# Altium PCB DVT-HPF-100kHz.PcbDoc
Units mm, origin at the board's own origin, x right, y up, seen from the top; angles counter-clockwise.
Board outline 60 x 45 mm, 2 copper layers (Top Layer, Bottom Layer); 21 components, 11 nets, 52 pads, 0 vias.
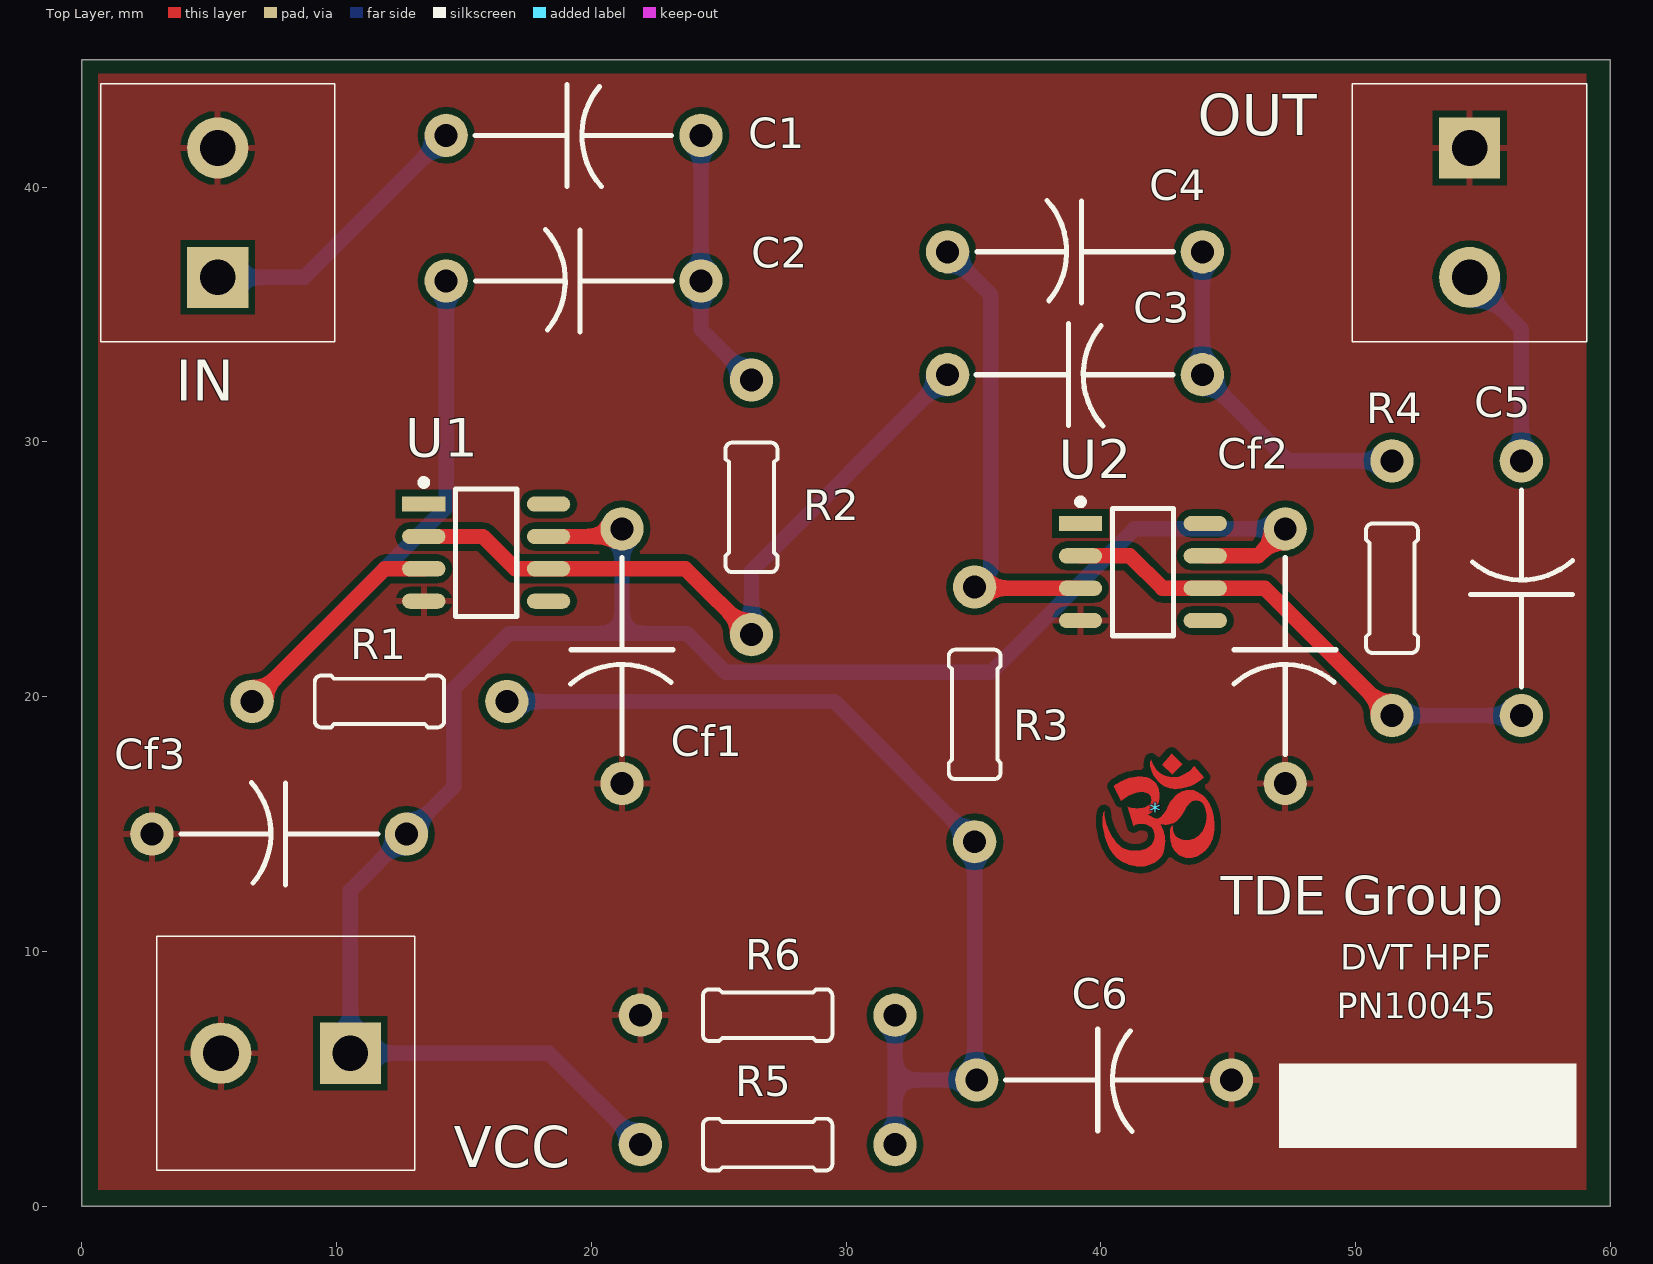
[diagram p0: Top Layer view]
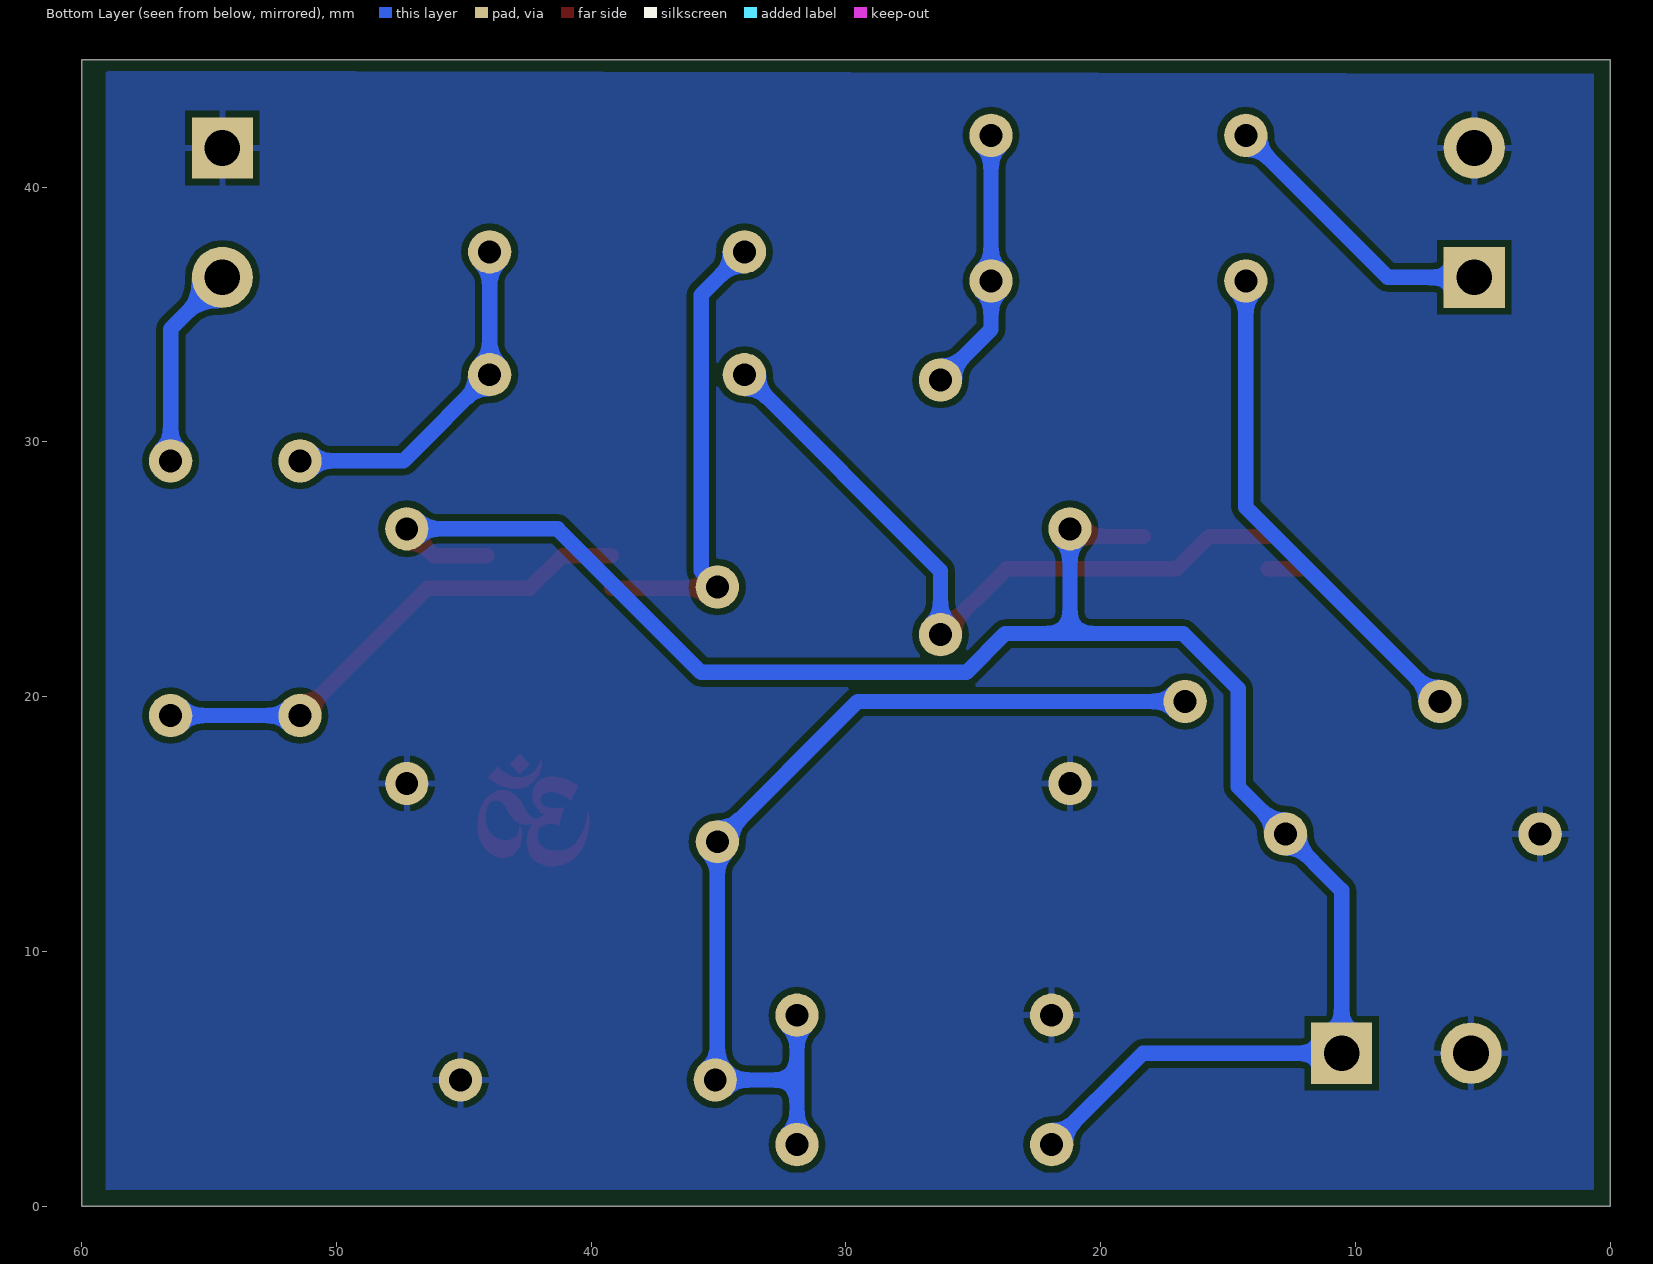
[diagram p1: Bottom Layer view, seen from below]

## Layer stack, top to bottom
Top Solder: solder mask 0.0102, Solder Resist, Dk 3.5
Top Layer: signal copper 0.0356
Dielectric 1: dielectric 0.32, FR-4, Dk 4.8
Bottom Layer: signal copper 0.0356
Bottom Solder: solder mask 0.0102, Solder Resist, Dk 3.5

## Board outline
0,0 0,45 60,45 60,0

## Design rules (kind name [scope] priority, off if disabled: settings)
Clearance Polygons [InPolygon] p1: gap=0.254
Clearance [All] p2: gap=0.15
MinimumSolderMaskSliver [All] p1: minsoldermaskwidth=0.1
PolygonConnect [All] p1: connectstyle=Relief reliefconductorwidth=0.254 reliefentries=4 polygonreliefangle="90 Angle" airgapwidth=0.254
RoomDefinition DVT-HPF-100kHz [InComponentClass('DVT-HPF-100kHz')] p1: confinementstyle=ConfineIn formatcopy=TRUE lockcomponents=FALSE outline -4.953,-7.112 67.31,-7.112 67.31,50.165 -4.953,50.165
RoutingVias [All] p1: holewidth=0.711 width=1.27 viastyle="Through Hole" minholewidth=0 minwidth=0 maxholewidth=0.711 maxwidth=1.27
SilkToSilkClearance [All] p1: silktosilkclearance=0.1
SilkToSolderMaskClearance [IsPad] p1: minsilkscreentomaskgap=0.1 clearancetoexposedcopper=TRUE
SolderMaskExpansion [All] p1: expansion=0.102
Width [All] p1: maxlimit=4 minlimit=0.254 preferedwidth=0.5
27 further rules are at their usual default settings.

## Components (designator, comment, footprint, x,y, rotation, side; value= is the part's Value field where it differs from the comment)
* "Om" Om-5mm 42.164,15.494 r0 top
C1 "Capacitor-Dummy-THT" Dummy-10mm 19.304,42.037 r0 top
C2 "Capacitor-Dummy-THT" Dummy-10mm 19.304,36.322 r180 top
C3 "Capacitor-Dummy-THT" Dummy-10mm 38.989,32.639 r0 top
C4 "Capacitor-Dummy-THT" Dummy-10mm 38.989,37.465 r180 top
C5 "Capacitor-Dummy-THT" Dummy-10mm 56.515,24.257 r90 top
C6 "Capacitor-Dummy-THT" Dummy-10mm 40.132,4.953 r0 top
Cf1 "Capacitor-Dummy-THT" Dummy-10mm 21.209,21.59 r270 top
Cf2 "Capacitor-Dummy-THT" Dummy-10mm 47.244,21.59 r270 top
Cf3 "Capacitor-Dummy-THT" Dummy-10mm 7.747,14.605 r180 top
IN "PHOENIX_1715721" Phoenix-2-5_08 5.334,39 r90 top
OUT "PHOENIX_1715721" Phoenix-2-5_08 54.483,39 r270 top
R1 "Resistor-Dummy-THT" Dummy-10mm 11.684,19.812 r180 top
R2 "Resistor-Dummy-THT" Dummy-10mm 26.289,27.432 r90 top
R3 "Resistor-Dummy-THT" Dummy-10mm 35.052,19.304 r90 top
R4 "Resistor-Dummy-THT" Dummy-10mm 51.435,24.257 r90 top
R5 "Resistor-Dummy-THT" Dummy-10mm 26.924,2.413 r180 top
R6 "Resistor-Dummy-THT" Dummy-10mm 26.924,7.493 r0 top
U1 "OPA820ID" SOP8_L 15.875,25.654 r0 top
U2 "OPA820ID" SOP8_L 41.656,24.892 r0 top
VCC "PHOENIX_1715721" Phoenix-2-5_08 8,6 r180 top

## Footprints (in the part's own frame and the unit in brackets; to place one, negate y for a bottom-side part, rotate by r counter-clockwise, add the part's x,y. Pads: shape width x height; smd on the part's side, far side on the other; paste and mask are expansions set on the pad)
Dummy-10mm [mm] "Dummy-10mm"
  round 1.7 hole 0.9: 1(-5,0) 2(5,0)
  silkscreen extent -3.88,-2.01 3.85,2, body extent -2.39,-0.88 2.41,0.88, height 1.87
Om-5mm [mm]
  Top Layer region: 539 vertices and 0 holes, not listed, extent -2.085,-2.163 2.295,1.363
  Top Layer region: 0.625,2.26 1.04,1.845 0.645,1.45 0.255,1.84
  Top Layer region: -0.185,2.025 -0.21,1.935 -0.21,1.78 -0.165,1.59 -0.095,1.43 -0.01,1.31 0.09,1.185 0.18,1.105 0.27,1.03 0.34,0.985 0.445,0.94 0.555,0.905 0.68,0.885 0.77,0.88 0.88,0.885 1.01,0.9 1.185,0.94 1.385,1.01 1.555,1.09 1.665,1.16 1.82,1.285 1.88,1.34 1.51,1.78 1.455,1.715 1.39,1.645 1.29,1.565 1.21,1.51 1.125,1.46 1.005,1.395 0.89,1.36 0.8,1.34 0.72,1.34 0.62,1.34 0.525,1.355 0.42,1.38 0.32,1.415 0.235,1.455 0.165,1.5 0.095,1.56 0.04,1.62 -0.025,1.7 -0.085,1.79 -0.13,1.87 -0.155,1.945
Phoenix-2-5_08 [mm] "Phoenix, 1715721"
  rect 2.4x2.4 hole 1.4: 1(-2.54,0)
  round 2.4 hole 1.4: 2(2.54,0)
  silkscreen extent -5.06,-4.6 5.06,4.6, body extent -5.05,-5.19 5.85,4.61, height 14.2
SOP8_L [mm] "SOIC, 8-Leads, Body 4.9x3.9mm, Pitch 1.27mm, IPC High Density"
  rect 1.7x0.6 smd: 1(-2.45,1.905)
  oval 1.7x0.6 smd: 2(-2.45,0.635) 3(-2.45,-0.635) 4(-2.45,-1.905) 5(2.45,-1.905) 6(2.45,-0.635) 7(2.45,0.635) 8(2.45,1.905)
  silkscreen extent -2.57,-2.5 1.2,2.88, body extent -3,-2.54 3,2.54, height 1.7

## Part data
IN OUT VCC: library part 2Pol_1715721, "Phoenix, 2 pol, 5.08mm, 22A, 715721"
U1 U2: "High speed OP, 260MHz"

## Nets (pads, with @x,y where several pads share a name; then routed paths per layer and width w, separated by ;. In a path a pad name is that pad's centre, name@x,y a point inside that pad or via, vN(x,y) a via of type N, cw(c..) or ccw(c..) an arc to the next point about the centre after c; other vN are vias at no path point)
GND: C6.2 Cf1.2 Cf2.2 Cf3.2 IN.2 OUT.1 R6.1 U1.4 U2.4 VCC.2
NetC1_1: C1.1 IN.1 | length 11.3
  Bottom Layer w0.6: IN.1 8.727,36.46 C1.1
NetC1_2: C1.2 C2.1 R2.2 | length 10.4
  Bottom Layer w0.6: C1.2 C2.1 24.304,34.417 R2.2
NetC2_2: C2.2 R1.2 U1.3 | length 28.6
  Top Layer w0.6: R1.2 11.891,25.019 U1.3
  Bottom Layer w0.6: R1.2 14.304,27.432 C2.2
NetC3_1: C3.1 R2.1 U1.2 U1.6 | length 27.9
  Top Layer w0.6: U1.2 15.748,26.289 17.018,25.019 U1.6 23.702,25.019 R2.1
  Bottom Layer w0.6: R2.1 26.289,24.939 C3.1
NetC3_2: C3.2 C4.1 R4.2 | length 13.7
  Bottom Layer w0.6: C4.1 C3.2 47.371,29.257 R4.2
NetC4_2: C4.2 R3.2 U2.3 | length 18.3
  Top Layer w0.6: R3.2 35.099,24.257 U2.3
  Bottom Layer w0.6: C4.2 35.687,35.767 35.687,24.939 R3.2
NetC5_1: C5.1 R4.1 U2.2 U2.6 | length 19.9
  Top Layer w0.6: U2.2 41.148,25.527 42.418,24.257 U2.6 46.435,24.257 R4.1
  Bottom Layer w0.6: R4.1 C5.1
NetC5_2: C5.2 OUT.2 | length 8
  Bottom Layer w0.6: OUT.2 56.515,34.428 C5.2
VCC: Cf1.1 Cf2.1 Cf3.1 R5.2 U1.7 U2.7 VCC.1 | length 76.1
  Top Layer w0.6: U1.7 20.908,26.289 Cf1.1 ; U2.7 46.181,25.527 Cf2.1
  Bottom Layer w0.6: Cf1.1 21.209,22.479 ; R5.2 18.337,6 VCC.1 10.54,12.398 Cf3.1 14.605,16.463 14.605,20.32 16.764,22.479 21.209,22.479 ; Cf2.1 41.322,26.59 35.687,20.955 25.273,20.955 23.749,22.479 21.209,22.479
VREF: C6.1 R1.1 R3.1 R5.1 R6.2 | length 38.2
  Bottom Layer w0.6: R1.1 29.544,19.812 R3.1 C6.1@35.052,5.033 ; R5.1 31.924,4.953 ; R6.2 31.924,4.953 ; C6.1 31.924,4.953
pads on no net: U1.1 U1.5 U1.8 U2.1 U2.5 U2.8

## Polygon pours and split planes (outlines as drawn)
GND on Top Layer "GND" (solid, pour order 0): 0.635,0.635 59.055,0.635 59.055,44.45 0.635,44.45
GND on Bottom Layer "GND-1" (solid, pour order 2): 0.635,0.635 59.055,0.635 59.055,44.577 0.635,44.45

## Silkscreen, mask and mechanical layers (free items; w line width, h text height)
Top Overlay:
  rectangle: 46.99,2.286 58.674,5.588
  text "TDE Group" at 44.704,11.43 h1.5
  text "DVT HPF" at 49.403,9.271 h1
  text "PN10045" at 49.276,7.366 h1
Outline:
  the board outline again, w0.5

## Dimensions
0,0 to 60,0 on Mechanical 16
60,0 to 60,45 on Mechanical 16